# EAGLE board emitter_prod (EAGLE 6.5.0)
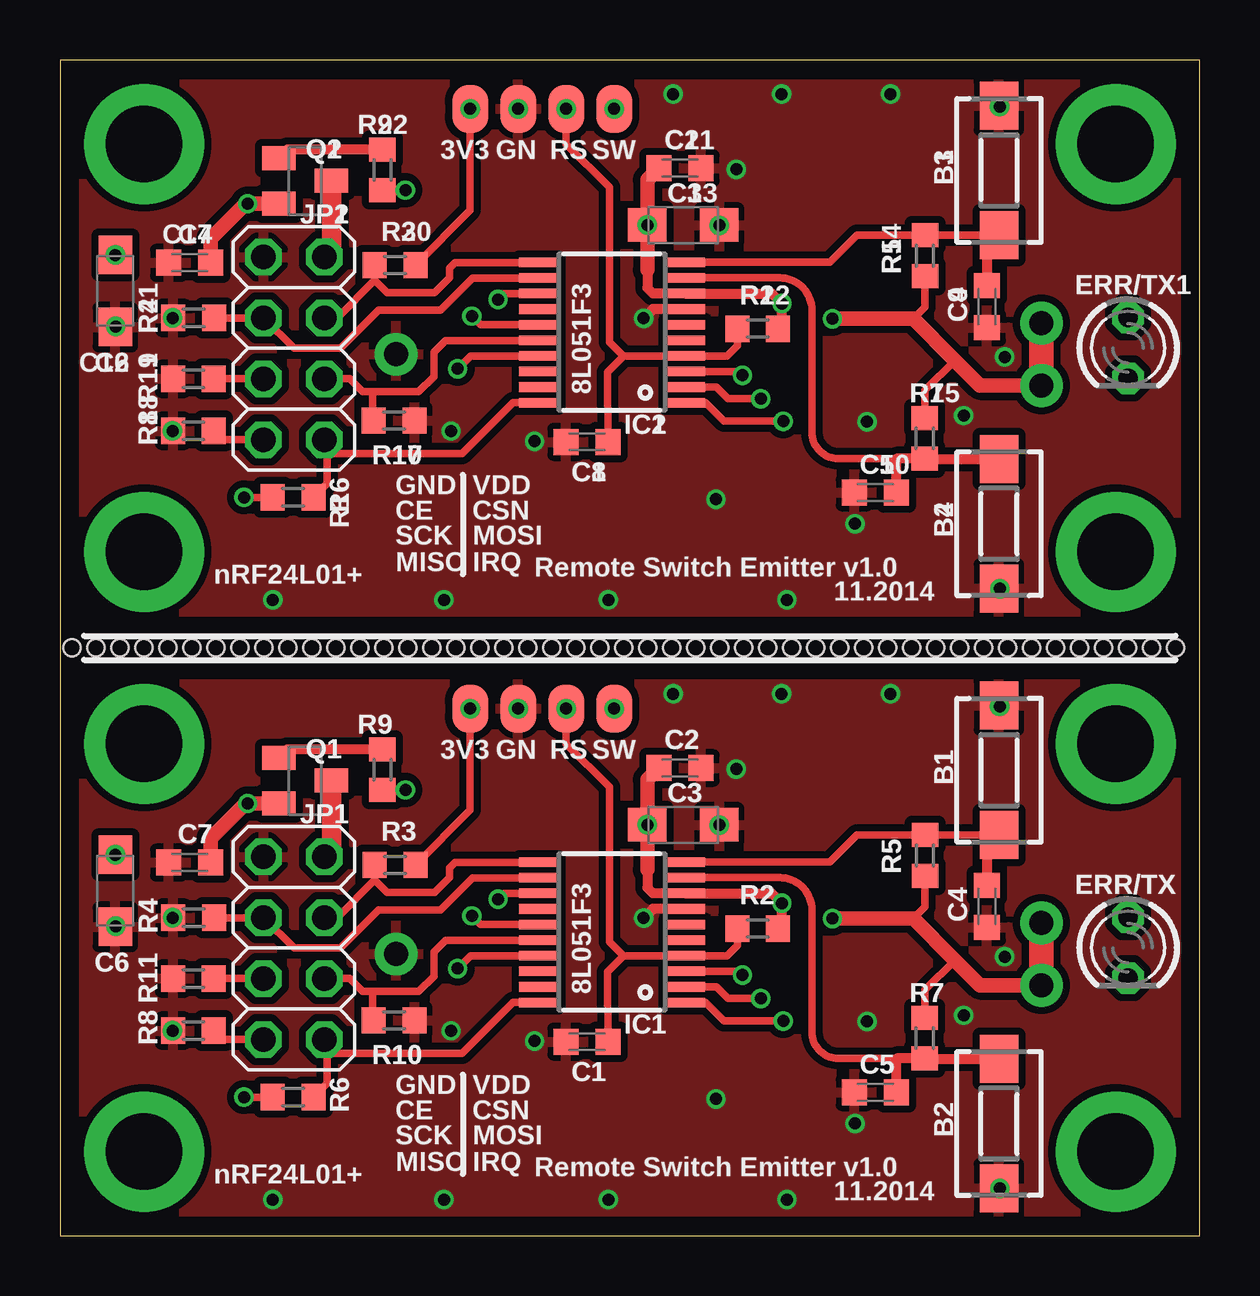
[diagram p0: board, top side]
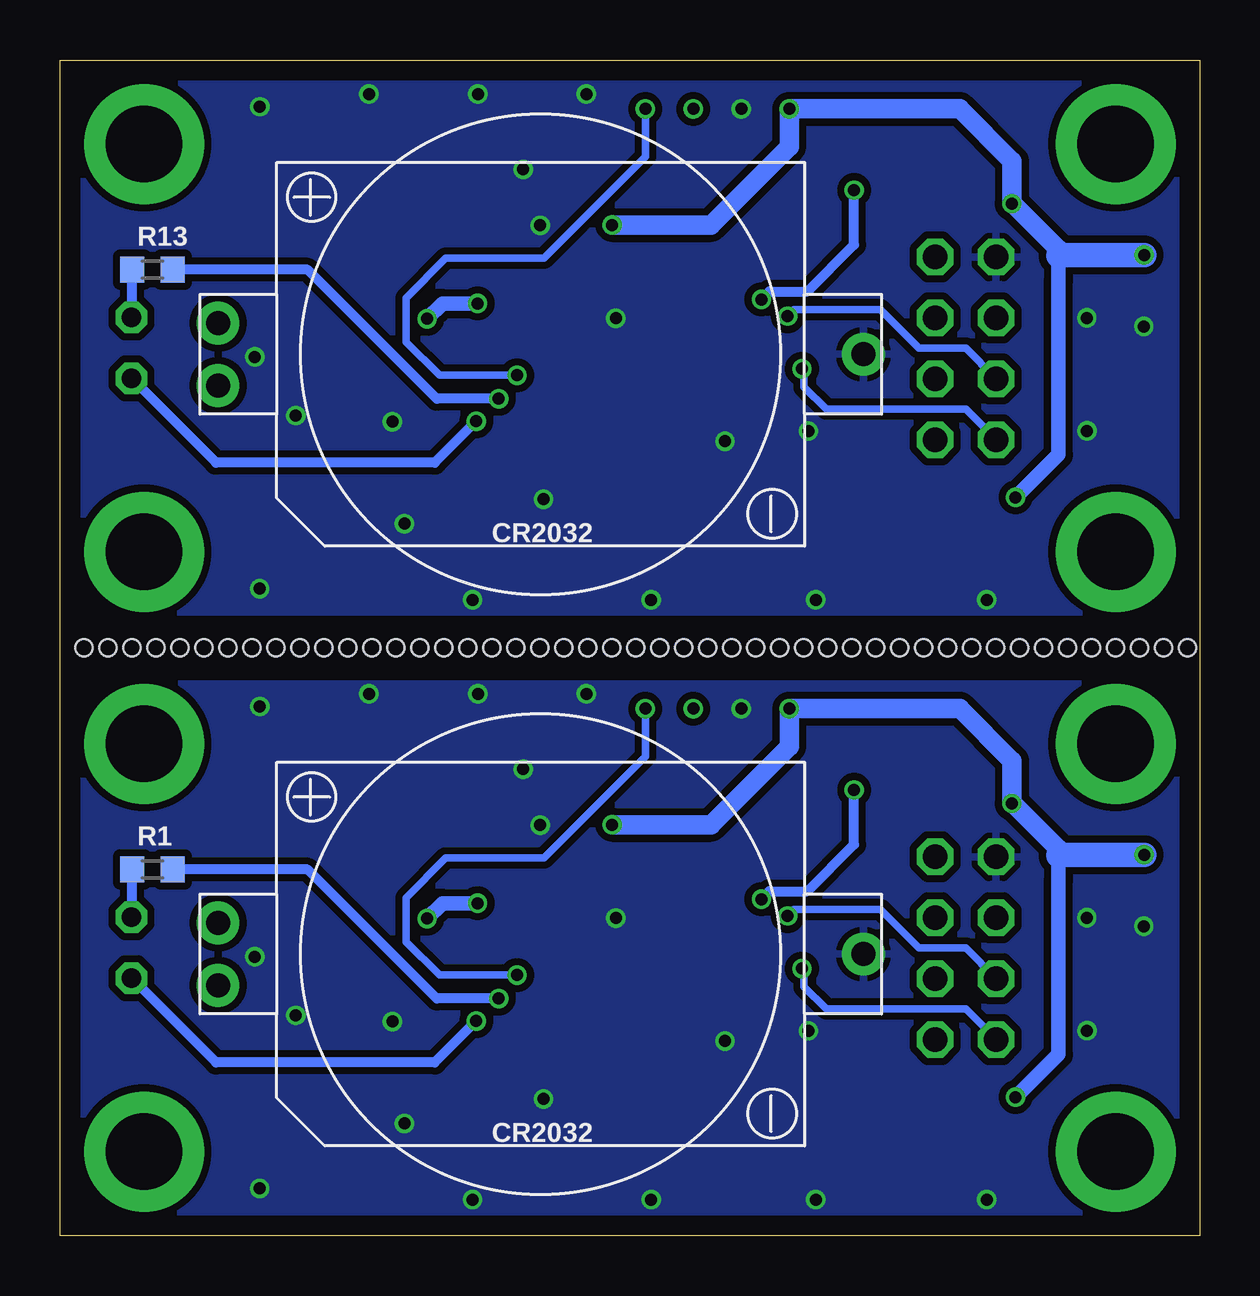
[diagram p1: board, bottom side, seen from below]

Size 47.5 x 49 mm. Coordinates in mm from the lower left corner, seen from the top.
Outline: 47.5,49 0,49 0,0 47.5,0 47.5,49
Copper layers (1*16): Top 0.035mm / dielectric 1.5mm / Bottom 0.035mm
Design rules "SeeedStudio_2layer_DRU_no_angle_20140221": minimum track width 6mil, minimum drill 12mil, track to track 6mil, track to pad 6mil, pad to pad 6mil, via to via 6mil, smd to smd 0mil, copper to edge 10mil, drill to drill 10mil, minimum pad ring 10mil, minimum via ring 6mil, stop-mask expansion 2mil, vias tented up to drill 100mil, thermal gap 10mil
Holes 0.7 mm at 0.5,24.5 1.5,24.5 2.5,24.5 3.5,24.5 4.5,24.5 5.5,24.5 6.5,24.5 7.5,24.5 8.5,24.5 9.5,24.5 10.5,24.5 11.5,24.5 12.5,24.5 13.5,24.5 14.5,24.5 15.5,24.5 16.5,24.5 17.5,24.5 18.5,24.5 19.5,24.5 20.5,24.5 21.5,24.5 22.5,24.5 23.5,24.5 24.5,24.5 25.5,24.5 26.5,24.5 27.5,24.5 28.5,24.5 29.5,24.5 30.5,24.5 31.5,24.5 32.5,24.5 33.5,24.5 34.5,24.5 35.5,24.5 36.5,24.5 37.5,24.5 38.5,24.5 39.5,24.5 40.5,24.5 41.5,24.5 42.5,24.5 43.5,24.5 44.5,24.5 45.5,24.5 46.5,24.5

## Footprints (pad centres in the part's own frame; a part is rotated, then mirrored left to right if it is on the bottom)
DTSM-3 = smd 2 x 1.6: 1 -2.7,0; 2 2.7,0
C0603K = smd 1.05 x 1.08: 1 -0.875,0; 2 0.875,0
SMC_A = smd 1.6 x 1.4: + -1.5,0; - 1.5,0
LED3MM = drill 0.813 octagon: A -1.27,0; K 1.27,0
KEYS1059 = drill 1 pad 1.778: + 13.45,1.3; - -13.45,0; @+ 13.45,-1.3
TSSOP20 = smd 0.4 x 1.65: 1 -3.575,-3.05; 2 -2.925,-3.05; 3 -2.275,-3.05; 4 -1.625,-3.05; 5 -0.975,-3.05; 6 -0.325,-3.05; 7 0.325,-3.05; 8 0.975,-3.05; 9 1.625,-3.05; 10 2.275,-3.05; 11 2.275,3.05; 12 1.625,3.05; 13 0.975,3.05; 14 0.325,3.05; 15 -0.325,3.05; 16 -0.975,3.05; 17 -1.625,3.05; 18 -2.275,3.05; 19 -2.925,3.05; 20 -3.575,3.05
2X04 = drill 1.016 octagon: 1 -3.81,-1.27; 2 -3.81,1.27; 3 -1.27,-1.27; 4 -1.27,1.27; 5 1.27,-1.27; 6 1.27,1.27; 7 3.81,-1.27; 8 3.81,1.27
SOT23-BEC = smd 1 x 1.4: B -0.95,-1.1; C 0,1.1; E 0.95,-1.1
R0603 = smd 1 x 1.1: 1 -0.85,0; 2 0.85,0
SMD_PAD = smd 2 x 1.5: P$1 0,0

## Placement (x,y rotation side)
B1  DTSM-3  [DTSM-3]  39.14,19.39 270 top
B2  DTSM-3  [DTSM-3]  39.14,4.67 90 top
B3  DTSM-3  [DTSM-3]  39.14,44.39 270 top
B4  DTSM-3  [DTSM-3]  39.14,29.67 90 top
C1  100n  [C0603K]  21.97,8.08 180 top
C2  100n  [C0603K]  25.84,19.49 0 top
C3  2.2u  [SMC_A]  25.98,17.12 0 top
C4  100n  [C0603K]  38.64,13.72 270 top
C5  100n  [C0603K]  33.99,5.97 180 top
C6  1u  [SMC_A]  2.31,14.37 270 top
C7  100n  [C0603K]  5.41,15.55 180 top
C8  100n  [C0603K]  21.97,33.08 180 top
C9  100n  [C0603K]  38.64,38.72 270 top
C10  100n  [C0603K]  33.99,30.97 180 top
C11  100n  [C0603K]  25.84,44.49 0 top
C12  1u  [SMC_A]  2.31,39.37 270 top
C13  2.2u  [SMC_A]  25.98,42.12 0 top
C14  100n  [C0603K]  5.41,40.55 180 top
ERR/TX  [LED3MM]  44.52,12 270 top
ERR/TX1  [LED3MM]  44.52,37 270 top
G1  KEYS1059  [KEYS1059]  27.46,11.73 180 bottom
G2  KEYS1059  [KEYS1059]  27.46,36.73 180 bottom
IC1  STM8L051F3  [TSSOP20]  23.01,13.29 90 top
IC2  STM8L051F3  [TSSOP20]  23.01,38.29 90 top
JP1  nrf24L01+  [2X04]  9.75,11.98 270 top
JP2  nrf24L01+  [2X04]  9.75,36.98 270 top
Q1  MMBT3906LT1SMD  [SOT23-BEC]  10.22,18.96 270 top
Q2  MMBT3906LT1SMD  [SOT23-BEC]  10.22,43.96 270 top
R1  220  [R0603]  43.65,15.26 0 bottom
R2  10k  [R0603]  29.08,12.8 0 top
R3  10k  [R0603]  13.97,15.45 0 top
R4  10k  [R0603]  5.57,13.25 0 top
R5  10k  [R0603]  36.06,15.84 270 top
R6  10k  [R0603]  9.72,5.77 180 top
R7  10k  [R0603]  36.04,8.23 90 top
R8  10k  [R0603]  5.56,8.54 0 top
R9  1K  [R0603]  13.44,19.42 90 top
R10  10k  [R0603]  13.93,8.97 180 top
R11  10k  [R0603]  5.56,10.71 0 top
R12  10k  [R0603]  29.08,37.8 0 top
R13  220  [R0603]  43.65,40.26 0 bottom
R14  10k  [R0603]  36.06,40.84 270 top
R15  10k  [R0603]  36.04,33.23 90 top
R16  10k  [R0603]  9.72,30.77 180 top
R17  10k  [R0603]  13.93,33.97 180 top
R18  10k  [R0603]  5.56,33.54 0 top
R19  10k  [R0603]  5.56,35.71 0 top
R20  10k  [R0603]  13.97,40.45 0 top
R21  10k  [R0603]  5.57,38.25 0 top
R22  1K  [R0603]  13.44,44.42 90 top
SIG_+3V1  CON_PAD  [SMD_PAD]  17.1,21.96 90 top
SIG_+3V2  CON_PAD  [SMD_PAD]  17.1,46.96 90 top
SIG_GND  CON_PAD  [SMD_PAD]  19.1,21.96 90 top
SIG_GND1  CON_PAD  [SMD_PAD]  19.1,46.96 90 top
SIG_RST  CON_PAD  [SMD_PAD]  21.1,21.96 90 top
SIG_RST1  CON_PAD  [SMD_PAD]  21.1,46.96 90 top
SIG_SWIM  CON_PAD  [SMD_PAD]  23.1,21.96 90 top
SIG_SWIM1  CON_PAD  [SMD_PAD]  23.1,46.96 90 top

## Library data of the parts
B1-B4 = switch-tact
C1-C14 R1-R22 = resistor
ERR/TX ERR/TX1 = led
G1 G2 SIG_+3V1 SIG_+3V2 SIG_GND SIG_GND1 SIG_RST SIG_RST1 SIG_SWIM SIG_SWIM1 = componente_RFSwitch
IC1 IC2 = componente_CarRF
JP1 JP2 = pinhead
Q1 Q2 = transistor-pnp

## Nets
+3V0: C2.1 C3.+ C6.+ C7.1 G1.+ G1.@+ IC1.8 Q1.E R2.2 R3.2 R5.2 R6.2 R7.2 SIG_+3V1.P$1
+3V1: C11.1 C12.+ C13.+ C14.1 G2.+ G2.@+ IC2.8 Q2.E R12.2 R14.2 R15.2 R16.2 R20.2 SIG_+3V2.P$1
BTN1: B1.2 C4.1 IC1.10 R5.1
BTN2: B2.2 C5.1 IC1.9 R7.1
BTN3: B3.2 C9.1 IC2.10 R14.1
BTN4: B4.2 C10.1 IC2.9 R15.1
GND: B1.1 B2.1 C1.2 C2.2 C3.- C4.2 C5.2 C6.- C7.2 G1.- IC1.7 JP1.1 R4.1 R8.1 R10.1 R11.1 SIG_GND.P$1
GND1: B3.1 B4.1 C8.2 C9.2 C10.2 C11.2 C12.- C13.- C14.2 G2.- IC2.7 JP2.1 R17.1 R18.1 R19.1 R21.1 SIG_GND1.P$1
LED_ERR_TX1: ERR/TX.K IC1.1
LED_ERR_TX2: IC1.2 R1.2
LED_ERR_TX3: IC2.2 R13.2
LED_ERR_TX4: ERR/TX1.K IC2.1
N$1: ERR/TX.A R1.1
N$4: JP1.2 Q1.C
N$8: Q1.B R9.2
N$12: JP2.2 Q2.C
N$13: Q2.B R22.2
N$14: ERR/TX1.A R13.1
NRF_CE: IC1.12 JP1.3 R4.2
NRF_CE1: IC2.12 JP2.3 R21.2
NRF_CSN: IC1.11 JP1.4 R3.1
NRF_CSN1: IC2.11 JP2.4 R20.1
NRF_IRQ: IC1.20 JP1.8 R6.1
NRF_IRQ1: IC2.20 JP2.8 R16.1
NRF_MISO: IC1.17 JP1.7 R8.2
NRF_MISO1: IC2.17 JP2.7 R18.2
NRF_MOSI: IC1.16 JP1.6 R10.2
NRF_MOSI1: IC2.16 JP2.6 R17.2
NRF_ON: IC1.13 R9.1
NRF_ON1: IC2.13 R22.1
NRF_SCK: IC1.15 JP1.5 R11.2
NRF_SCK1: IC2.15 JP2.5 R19.2
RST: C1.1 IC1.4 R2.1 SIG_RST.P$1
RST1: C8.1 IC2.4 R12.1 SIG_RST1.P$1
SWIM: IC1.3 SIG_SWIM.P$1
SWIM1: IC2.3 SIG_SWIM1.P$1

## Tracks (layer width: path | path; a pad name or v marks a point on that pad's centre or on a via)
+3V0  (via drill 0.5)
  Top 0.305: IC1.8 | R7.2 36.06,9.1 36.06,10.23 37.3,11.47 | R5.2 36.06,13.7 35.57,13.21 | R6.2 v7.67,5.77 | R3.2 17.1,17.73 SIG_+3V1.P$1
  Top 0.406: IC1.8 29.68,14.27 v30.09,13.85 30.09,12.96 R2.2 | IC1.8 24.71,14.27 24.48,14.5 24.48,15.26
  Top 0.61: v32.2,13.21 35.57,13.21 37.3,11.47 38.35,10.43 G1.+ | Q1.E v7.82,18.01 7.74,18.01 6.29,16.56 C7.1 | C2.1 24.48,19 C3.+ 24.48,15.26
  Top 1.016: G1.+ G1.@+
  Bottom 0.61: 5.89,16.11 5.89,15.84 5.89,14.8 5.88,14.79 5.88,7.55 5.89,7.55 v7.67,5.77 | v7.82,18.01 7.79,18.01 | v32.2,13.21 31.56,13.85 v30.09,13.85
  Bottom 0.813: 7.79,18.01 5.89,16.11 | C3.+ 20.37,17.12 17.1,20.39 SIG_+3V1.P$1 10,21.96 7.82,19.78 v7.82,18.01
  Bottom 1.016: C6.+ 5.86,15.87 5.89,15.84
  other vias: 2.31,15.87 17.1,21.96 24.48,17.12
+3V1  (via drill 0.5)
  Top 0.305: IC2.8 | R15.2 36.06,34.1 36.06,35.23 37.3,36.48 | R14.2 36.06,38.7 35.57,38.21 | R16.2 v7.67,30.77 | R20.2 17.1,42.73 SIG_+3V2.P$1
  Top 0.406: IC2.8 29.68,39.27 v30.09,38.85 30.09,37.96 R12.2 | IC2.8 24.71,39.27 24.48,39.5 24.48,40.26
  Top 0.61: v32.2,38.21 35.57,38.21 37.3,36.48 38.35,35.43 G2.+ | Q2.E v7.82,43.01 7.74,43.01 6.29,41.56 C14.1 | C11.1 24.48,44.01 C13.+ 24.48,40.26
  Top 1.016: G2.+ G2.@+
  Bottom 0.61: 5.89,41.11 5.89,40.84 5.89,39.8 5.88,39.79 5.88,32.55 5.89,32.55 v7.67,30.77 | v7.82,43.01 7.79,43.01 | v32.2,38.21 31.56,38.85 v30.09,38.85
  Bottom 0.813: 7.79,43.01 5.89,41.11 | C13.+ 20.37,42.12 17.1,45.39 SIG_+3V2.P$1 10,46.96 7.82,44.78 v7.82,43.01
  Bottom 1.016: C12.+ 5.86,40.87 5.89,40.84
  other vias: 2.31,40.87 17.1,46.96 24.48,42.12
BTN1
  Top 0.305: IC1.10 32.1,15.57 33.22,16.69 R5.1 B1.2
  Top 0.406: B1.2 38.64,16.69 C4.1
BTN2
  Top 0.305: R7.1 | 34.87,7.38 32.45,7.38 arc-90 31.34,8.49 31.34,13.58 arc90 30,14.92 IC1.9 arc90 IC1.9
  Top 0.406: R7.1 B2.2 | R7.1 34.87,7.38 C5.1
BTN3
  Top 0.305: IC2.10 32.1,40.57 33.22,41.69 R14.1 B3.2
  Top 0.406: B3.2 38.64,41.69 C9.1
BTN4
  Top 0.305: R15.1 | 34.87,32.38 32.45,32.38 arc-90 31.34,33.49 31.34,38.58 arc90 30,39.92 IC2.9 arc90 IC2.9
  Top 0.406: R15.1 B4.2 | R15.1 34.87,32.38 C10.1
GND  (via drill 0.5)
  Top 0.406: IC1.7 24.71,13.62 v24.33,13.23
  other vias: 4.7,13.25 4.69,8.54 8.87,1.5 19.78,8.11 16.3,8.53 33.14,4.67 25.56,22.58 16,1.5 28.19,19.44 34.62,22.58 30.08,22.58 27.34,5.69 39.17,22.05 22.86,1.5 30.3,1.5 39.18,1.96 33.64,8.92 27.48,17.11 37.67,9.18 2.32,12.89 19.1,21.96 39.38,11.62
  pour Top (isolate 0.3): 1,23 46.5,23 46.5,1 1,1
  pour Bottom (isolate 0.3): 1,1 46.5,1 46.5,23 1,23
GND1  (via drill 0.5)
  Top 0.406: IC2.7 24.71,38.62 v24.33,38.23
  other vias: 4.7,38.25 4.69,33.54 8.87,26.5 19.78,33.11 16.3,33.53 33.14,29.67 25.56,47.58 16,26.5 28.19,44.44 34.62,47.58 30.08,47.58 27.34,30.69 39.17,47.05 22.86,26.5 30.3,26.5 39.18,26.96 33.64,33.92 27.48,42.11 37.67,34.18 2.32,37.89 19.1,46.96 39.38,36.62
  pour Top (isolate 0.3): 1,48 46.5,48 46.5,26 1,26
  pour Bottom (isolate 0.3): 1,26 46.5,26 46.5,48 1,48
LED_ERR_TX1  (via drill 0.5)
  Top 0.305: IC1.1 26.91,9.71 27.68,8.94 v30.15,8.94
  Bottom 0.406: v30.15,8.94 31.88,7.21 41,7.21 ERR/TX.K
LED_ERR_TX2  (via drill 0.5)
  Top 0.305: IC1.2 arc-90 IC1.2 27.36,10.37 27.84,9.88 v29.21,9.88
  Bottom 0.406: v29.21,9.88 31.8,9.88 37.18,15.26 R1.2
LED_ERR_TX3  (via drill 0.5)
  Top 0.305: IC2.2 arc-90 IC2.2 27.36,35.37 27.84,34.88 v29.21,34.88
  Bottom 0.406: v29.21,34.88 31.8,34.88 37.18,40.26 R13.2
LED_ERR_TX4  (via drill 0.5)
  Top 0.305: IC2.1 26.91,34.71 27.68,33.94 v30.15,33.94
  Bottom 0.406: v30.15,33.94 31.88,32.21 41,32.21 ERR/TX1.K
N$1
  Bottom 0.406: R1.1 44.52,15.26 ERR/TX.A
N$2  (via drill 3.2 pad 5)
  other vias: 3.5,45.5
N$3  (via drill 3.2 pad 5)
  other vias: 3.5,20.5
N$4
  Top 0.813: Q1.C 11.32,16.09 JP1.2
N$5  (via drill 3.2 pad 5)
  other vias: 44,20.5
N$6  (via drill 3.2 pad 5)
  other vias: 3.5,3.5
N$7  (via drill 3.2 pad 5)
  other vias: 44,3.5
N$8
  Top 0.406: R9.2 9.48,20.27 Q1.B
N$9  (via drill 3.2 pad 5)
  other vias: 44,45.5
N$10  (via drill 3.2 pad 5)
  other vias: 3.5,28.5
N$11  (via drill 3.2 pad 5)
  other vias: 44,28.5
N$12
  Top 0.813: Q2.C 11.32,41.09 JP2.2
N$13
  Top 0.406: R22.2 9.48,45.27 Q2.B
N$14
  Bottom 0.406: R13.1 44.52,40.26 ERR/TX1.A
NRF_CE
  Top 0.305: R4.2 JP1.3 9.75,11.98 11.69,11.98 13.29,13.58 15.87,13.58 17.2,14.91 IC1.12
NRF_CE1
  Top 0.305: R21.2 JP2.3 9.75,36.98 11.69,36.98 13.29,38.58 15.87,38.58 17.2,39.91 IC2.12
NRF_CSN
  Top 0.305: IC1.11 16.46,15.56 16.23,15.33 16.23,14.92 15.61,14.3 13.64,14.3 13.12,14.82 | R3.1 13.12,14.82 | 13.12,14.82 11.55,13.25 JP1.4
NRF_CSN1
  Top 0.305: IC2.11 16.46,40.56 16.23,40.33 16.23,39.92 15.61,39.3 13.64,39.3 13.12,39.82 | R20.1 13.12,39.82 | 13.12,39.82 11.55,38.25 JP2.4
NRF_IRQ
  Top 0.305: 11.14,7.59 16.77,7.59 18.89,9.71 IC1.20 | R6.1 11.14,6.34 11.14,7.59 | 11.14,7.59 11.02,7.71 JP1.8
NRF_IRQ1
  Top 0.305: 11.14,32.59 16.77,32.59 18.89,34.72 IC2.20 | R16.1 11.14,31.34 11.14,32.59 | 11.14,32.59 11.02,32.71 JP2.8
NRF_MISO  (via drill 0.5)
  Top 0.305: v16.57,11.13 17.11,11.66 IC1.17 | JP1.7 6.78,8.17 R8.2
  Bottom 0.305: JP1.7 8.48,8.19 9.73,9.44 15.55,9.44 16.48,10.37 16.48,11.04 v16.57,11.13
NRF_MISO1  (via drill 0.5)
  Top 0.305: v16.57,36.13 17.11,36.66 IC2.17 | JP2.7 6.78,33.17 R18.2
  Bottom 0.305: JP2.7 8.48,33.19 9.73,34.44 15.55,34.44 16.48,35.37 16.48,36.04 v16.57,36.13
NRF_MOSI
  Top 0.305: JP1.6 12.08,10.71 12.62,10.17 13.04,10.17 | 13.04,10.17 14.95,10.17 15.59,10.81 15.59,11.82 16.08,12.31 IC1.16 | R10.2 13.04,9.01 13.04,10.17
NRF_MOSI1
  Top 0.305: JP2.6 12.08,35.71 12.62,35.17 13.04,35.17 | 13.04,35.17 14.95,35.17 15.59,35.81 15.59,36.82 16.08,37.31 IC2.16 | R17.2 13.04,34.01 13.04,35.17
NRF_ON  (via drill 0.5)
  Top 0.305: IC1.13 18.5,14.27 v18.26,14.02
  Top 0.406: R9.1 v14.4,18.57
  Bottom 0.406: v18.26,14.02 17.93,14.35 16.35,14.35 14.4,16.3 v14.4,18.57
NRF_ON1  (via drill 0.5)
  Top 0.305: IC2.13 18.5,39.27 v18.26,39.02
  Top 0.406: R22.1 v14.4,43.57
  Bottom 0.406: v18.26,39.02 17.93,39.35 16.35,39.35 14.4,41.3 v14.4,43.57
NRF_SCK  (via drill 0.5)
  Top 0.305: R11.2 JP1.5 | IC1.15 17.53,12.96 v17.17,13.32
  Bottom 0.305: JP1.5 9.75,11.98 11.69,11.98 13.3,13.59 16.9,13.59 v17.17,13.32
NRF_SCK1  (via drill 0.5)
  Top 0.305: R19.2 JP2.5 | IC2.15 17.53,37.96 v17.17,38.32
  Bottom 0.305: JP2.5 9.75,36.98 11.69,36.98 13.3,38.59 16.9,38.59 v17.17,38.32
RST  (via drill 0.5)
  Top 0.305: 23.5,11.66 IC1.4 27.8,11.66 28.23,12.1 R2.1 | 23.5,11.66 22.82,10.99 C1.1 | 23.5,11.66 22.91,12.25 22.91,18.69 21.1,20.5 SIG_RST.P$1
  other vias: 21.1,21.96
RST1  (via drill 0.5)
  Top 0.305: 23.5,36.66 IC2.4 27.8,36.66 28.23,37.1 R12.1 | 23.5,36.66 22.82,35.99 C8.1 | 23.5,36.66 22.91,37.25 22.91,43.69 21.1,45.5 SIG_RST1.P$1
  other vias: 21.1,46.96
SWIM  (via drill 0.5)
  Top 0.305: IC1.3 28.3,11.02 v28.45,10.86
  Bottom 0.305: v28.45,10.86 31.68,10.86 33.07,12.25 33.07,14.08 31.42,15.73 27.32,15.73 23.09,19.96 SIG_SWIM.P$1
  other vias: 23.1,21.96
SWIM1  (via drill 0.5)
  Top 0.305: IC2.3 28.3,36.02 v28.45,35.86
  Bottom 0.305: v28.45,35.86 31.68,35.86 33.07,37.25 33.07,39.08 31.42,40.73 27.32,40.73 23.09,44.96 SIG_SWIM1.P$1
  other vias: 23.1,46.96

## Text on the board
tPlace: 3V3 | GN | RS | SW | 8L051F3 | GND | VDD | CE | CSN | SCK | MOSI | MISO | IRQ | nRF24L01+ | Remote Switch Emitter v1.0 | 11.2014 | 3V3 | GN | RS | SW | 8L051F3 | GND | VDD | CE | CSN | SCK | MOSI | MISO | IRQ | nRF24L01+ | Remote Switch Emitter v1.0 | 11.2014
bPlace: CR2032 | CR2032
_tNames: R9 | Q1 | C2 | B1 | C3 | C7 | JP1 | R3 | R5 | R2 | ERR/TX | R4 | C4 | C6 | R11 | R7 | R8 | R10 | IC1 | R6 | C1 | C5 | B2 | R9 | Q1 | C2 | B1 | C3 | C7 | JP1 | R3 | R5 | R2 | ERR/TX | R4 | C4 | C6 | R11 | R7 | R8 | R10 | IC1 | R6 | C1 | C5 | B2
_bNames: R1 | R1